# Altium PCB Depth Sensor for SPL1301 V1.0.PcbDoc
Units mil, origin at the board's own origin, x right, y up, seen from the top; angles counter-clockwise.
Board outline 521.84 x 521.84 mil, 2 copper layers (Top Layer, Bottom Layer); 8 components, 6 nets, 29 pads, 9 vias.
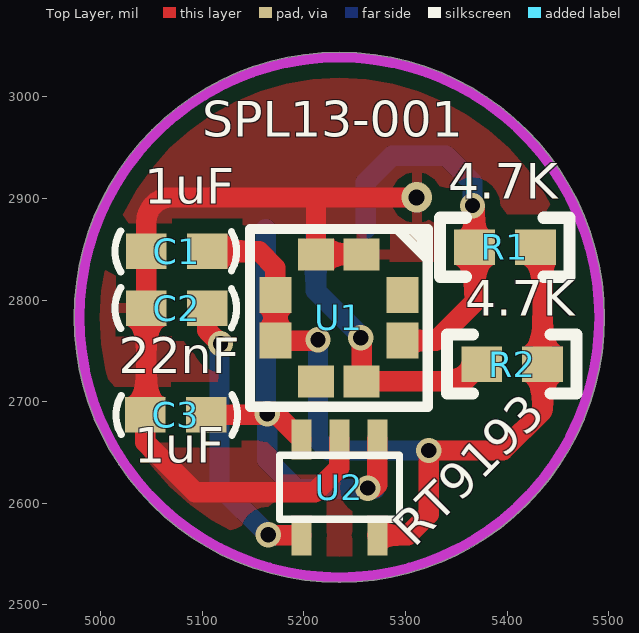
[diagram p0: Top Layer view]
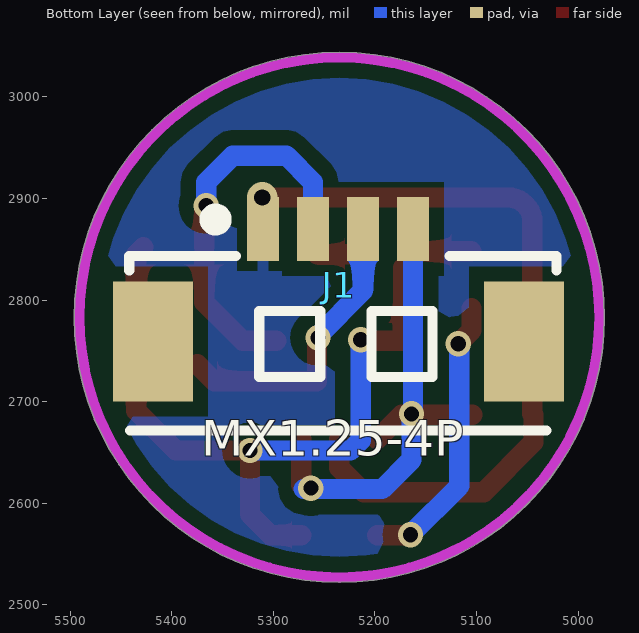
[diagram p1: Bottom Layer view, seen from below]

## Layer stack, top to bottom
Top Solder: solder mask 0.4, Solder Resist, Dk 3.5
Top Layer: signal copper 1.4
Dielectric 1: dielectric 12.6, FR-4, Dk 4.8
Bottom Layer: signal copper 1.4
Bottom Solder: solder mask 0.4, Solder Resist, Dk 3.5

## Board outline
4974.08,2783 ccw(c5235,2783) 5235,2522.08 ccw(c5235,2783) 5495.92,2783 ccw(c5235,2783) 5235,3043.92 ccw(c5235,2783)

## Design rules (kind name [scope] priority, off if disabled: settings)
Clearance [All] p1: gap=10
PolygonConnect [All] p1: connectstyle=Relief reliefconductorwidth=10 reliefentries=4 polygonreliefangle="90 Angle" airgapwidth=10
RoutingVias [All] p1: holewidth=28 width=50 viastyle="Through Hole" minholewidth=28 minwidth=50 maxholewidth=28 maxwidth=50
SolderMaskExpansion [All] p1: expansion=4
Width [All] p1: maxlimit=210 minlimit=10 preferedwidth=20 toplayer_maxwidth=120 minimp=50.000000 maximp=50.000000 favimp=50.000000
30 further rules are at their usual default settings.

## Components (designator, comment, footprint, x,y, rotation, side; value= is the part's Value field where it differs from the comment)
C1 "1uF" 0603C 5008,2566 r180 top
C2 "22nF" 0603C 5008,2510 r180 top
C3 "1uF" 0603C 5141,2969 r0 top
J1 "MX1.25-4P" MX1.25-4P 8205.85,1944.35 r0 top
R1 "4.7K" 0603R 5426,2851 r180 top
R2 "4.7K" 0603R 5433,2736 r180 top
U1 "SPL13-001" SPL13-001 5237,2790 r0 top
U2 "RT9193" RT9193 5272.4,2663 r0 top

## Footprints (in the part's own frame and the unit in brackets; to place one, negate y for a bottom-side part, rotate by r counter-clockwise, add the part's x,y. Pads: shape width x height; smd on the part's side, far side on the other; paste and mask are expansions set on the pad)
0603C [mil]
  rect 40x35 smd: 1(-97,-282) 2(-37,-282)
  silkscreen extent -126,-302 -6,-262, body extent -117,-299 -14,-260, height 35
0603R [mil]
  rect 40x35 smd: 1(-2,-1) 2(58,-1)
  silkscreen extent -35,-30 92,28, body extent -5,-17 61,15, height 22
MX1.25-4P [mm]
  rect 2x3 smd far side: 0(-80.07,20.701) 0(-70.806,20.701)
  rect 0.8x1.6 smd far side: 1(-73.549,23.512) 2(-74.799,23.512) 3(-76.049,23.512) 4(-77.299,23.512)
  body extent -80.44,18.74 -70.29,23.93, height 3.4
RT9193 [mm]
  rect 0.5x1 smd: 1(0,0) 2(-0.95,0) 3(-1.9,0) 4(-1.9,-2.4) 5(0,-2.4)
  silkscreen extent -2.45,-2 0.55,-0.4, body extent -2.4,-2.6 0.5,0.2, height 1.09
SPL13-001 [mm]
  rect 0.9x0.8 smd: 1(0.508,1.397) 2(-0.635,1.397) 5(-0.635,-1.778) 6(0.508,-1.778)
  rect 0.8x0.9 smd: 3(-1.651,0.381) 4(-1.651,-0.762) 8(1.524,0.381)
  rect 0.8x0.9 smd paste+0: 7(1.524,-0.762)
  silkscreen extent -2.29,-2.41 2.16,2.03

## Part data
C1 C2 C3: library part Cap1, "无极贴片电容"
J1: library part MX1.25-4P_1
R1 R2: library part Res, "电阻"
U1: library part SPL13-001_1

## Via types
v1: diameter 25, hole 15, Top Layer to Bottom Layer, 8 vias
v2: diameter 30, hole 16, Top Layer to Bottom Layer, 1 vias

## Nets (pads, with @x,y where several pads share a name; then routed paths per layer and width w, separated by ;. In a path a pad name is that pad's centre, name@x,y a point inside that pad or via, vN(x,y) a via of type N, cw(c..) or ccw(c..) an arc to the next point about the centre after c; other vN are vias at no path point)
3.3V: C1.1 R1.1 R2.1 U1.3 U1.4 U2.5 | length 813.9
  Top Layer w20: C1.1 5156,2848 5172,2832 U1.3 U1.4 v1@5214,2760 ; U2.5 5302.51,2568.51 5323,2589 v1(5323,2652) 5396,2652 5435,2691 R2.1 5435,2845 R1.1
  Bottom Layer w20: v1(5214,2761) 5214,2662 5224,2652 v1(5323,2652)
GND: C1.2 C2.2 C3.1 J1.1 U1.1 U1.2 U2.2 | length 848.5
  Top Layer w20: U2.2 5235,2635 5211,2611 5093,2611 5044,2660 C3.1 5045,2688 C2.2 5045,2877 cw(c5069,2877) 5069,2901 5210,2901 ; U1.1 U1.2 5212,2899 ccw(c5210,2899) 5210,2901 ; v2(5311,2901) 5210,2901
NetC2_1: C2.1 U2.4 | length 280.9
  Top Layer w20: C2.1 5105,2770 v1(5118,2757) ; v1@5165,2568.51 U2.4
  Bottom Layer w20: v1@5117,2757 5117,2617 v1(5165,2569)
SCK: J1.3 R2.2 U1.6 | length 293.3
  Top Layer w20: v1@5257,2765 U1.6 5358,2720 R2.2
  Bottom Layer w20: J1.3 5211.79,2809.17 v1@5255.96,2765
  other v1: 5256,2763
SDA: J1.2 R1.2 U1.7 | length 367.1
  Top Layer w20: U1.7 5330,2760 5368,2798 R1.2@5368,2839 ; v1(5366,2893) 5368,2891 R1.2
  Bottom Layer w20: J1.2 5261,2916 5287,2942 5340,2942 5366,2916 v1(5366,2893) v1@5366,2891
VCC: C3.2 J1.4 U2.1 U2.3 | length 505
  Top Layer w20: C3.2 5173.6,2687 U2.3 ; v1(5263,2615) 5269,2615 5272.4,2618.4 U2.1
  Bottom Layer w20: J1.4 5162.57,2690.43 v1@5165,2688 ; v1(5164,2688) 5164,2643 5193,2614 v1@5270,2614
pads on no net: J1.0 U1.5 U1.8

## Polygon pours and split planes (outlines as drawn)
GND on Top Layer "Top Layer-No Net" (solid, remove dead copper, pour order 4): 4885,2830 4885,3004 cw(c4985,3004) 4985,3104 5010,3104 5468,3104 cw(c5468,3004) 5568,3004 5568,2858 5568,2585 cw(c5468,2585) 5468,2485 5449,2485 4980,2485 cw(c4980,2585) 4880,2585 4880,2614
GND on Bottom Layer "Top Layer-No Net" (solid, remove dead copper, pour order 6): 4899,2845 4899,2996 cw(c4999,2996) 4999,3096 5067,3096 5430,3096 cw(c5430,2996) 5530,2996 5530,2728 5530,2549 cw(c5430,2549) 5430,2449 5373,2449 4996,2449 cw(c4996,2549) 4896,2549 4896,2627

## Keep-outs
Keep-Out Layer:
  circle w10: c5235,2783 r255.91

## Silkscreen, mask and mechanical layers (free items; w line width, h text height)
Top Overlay:
  lines w10: 5292,2870 5320,2842 ; 5308,2868 5322,2854 5322,2853